# Altium PCB PCB1.PcbDoc
Units mil, origin at the board's own origin, x right, y up, seen from the top; angles counter-clockwise.
Board outline 6000 x 4000 mil, 2 copper layers (Top Layer, Bottom Layer); 55 components, 41 nets, 167 pads, 2 vias.
Unrouted connection lines stored in the file: 107.
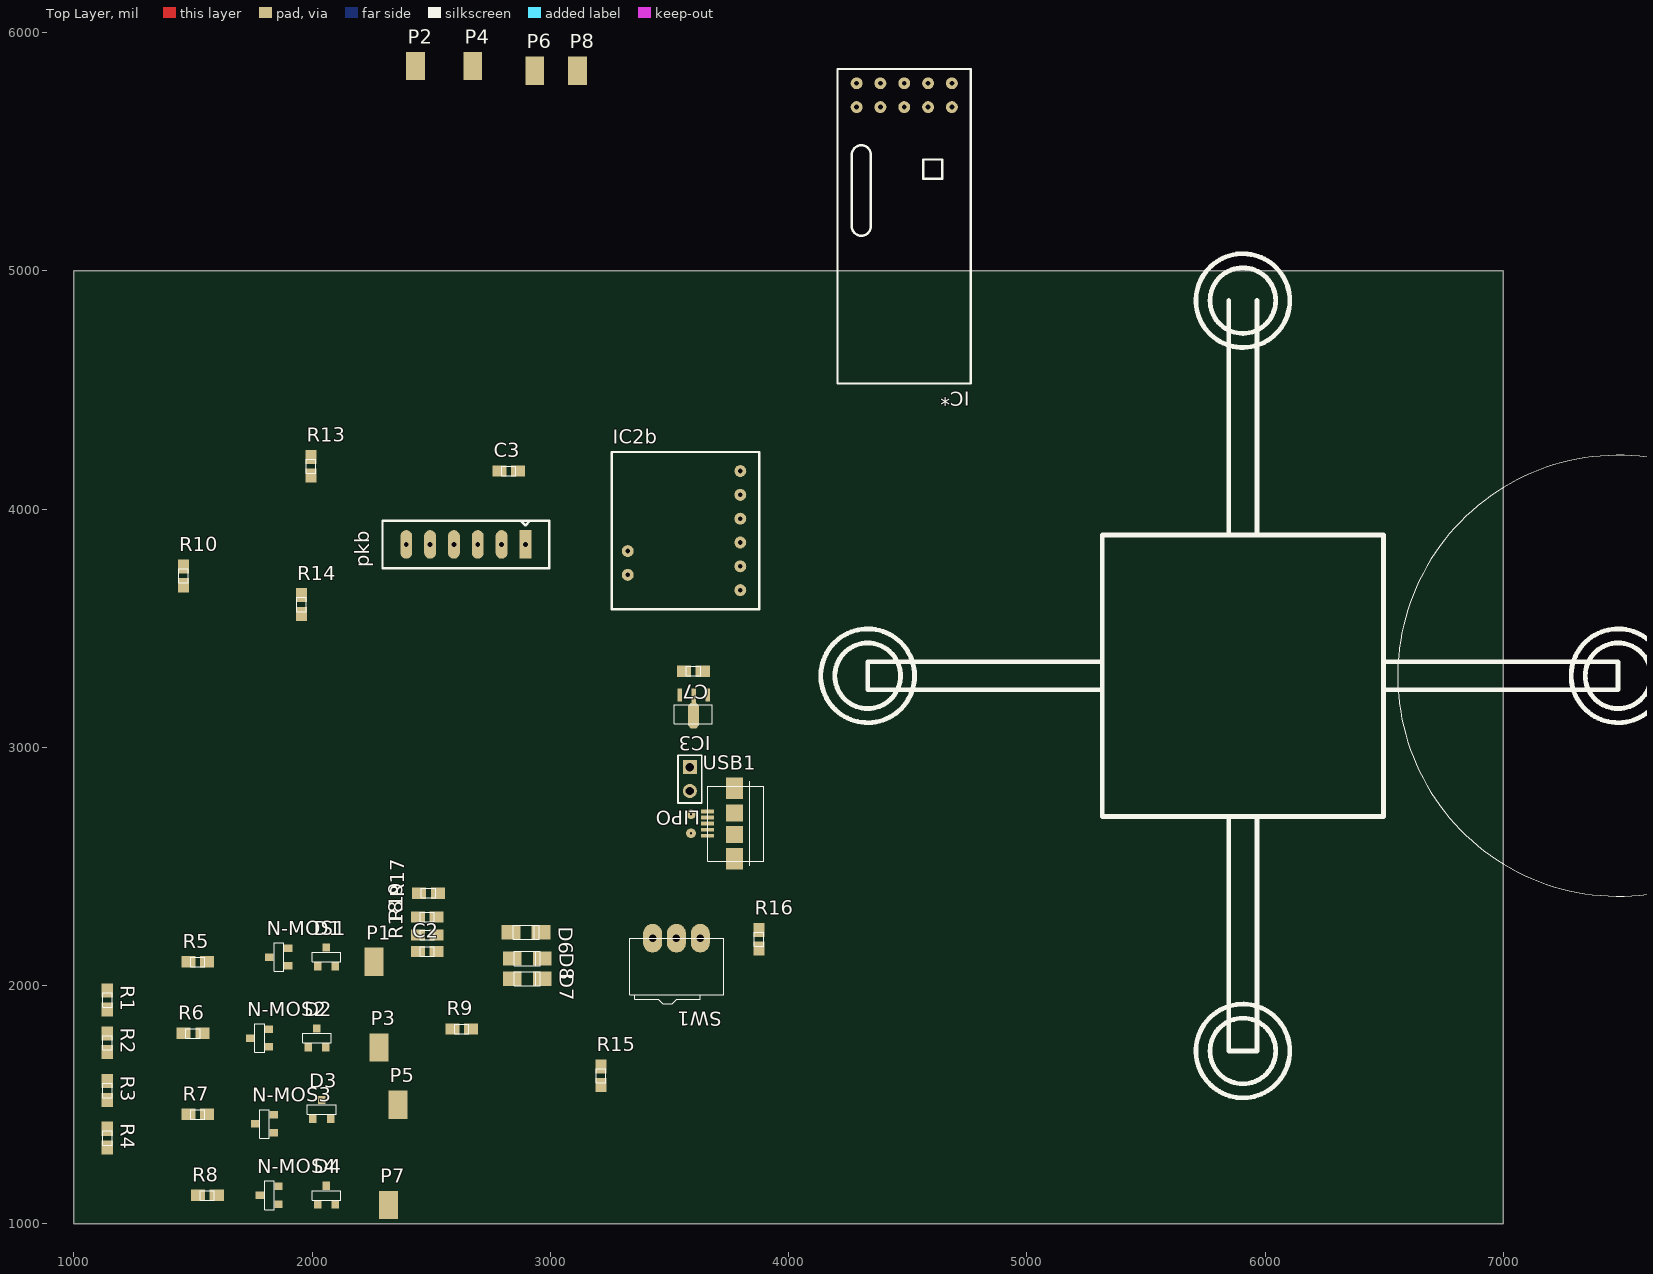
[diagram p0: Top Layer view]
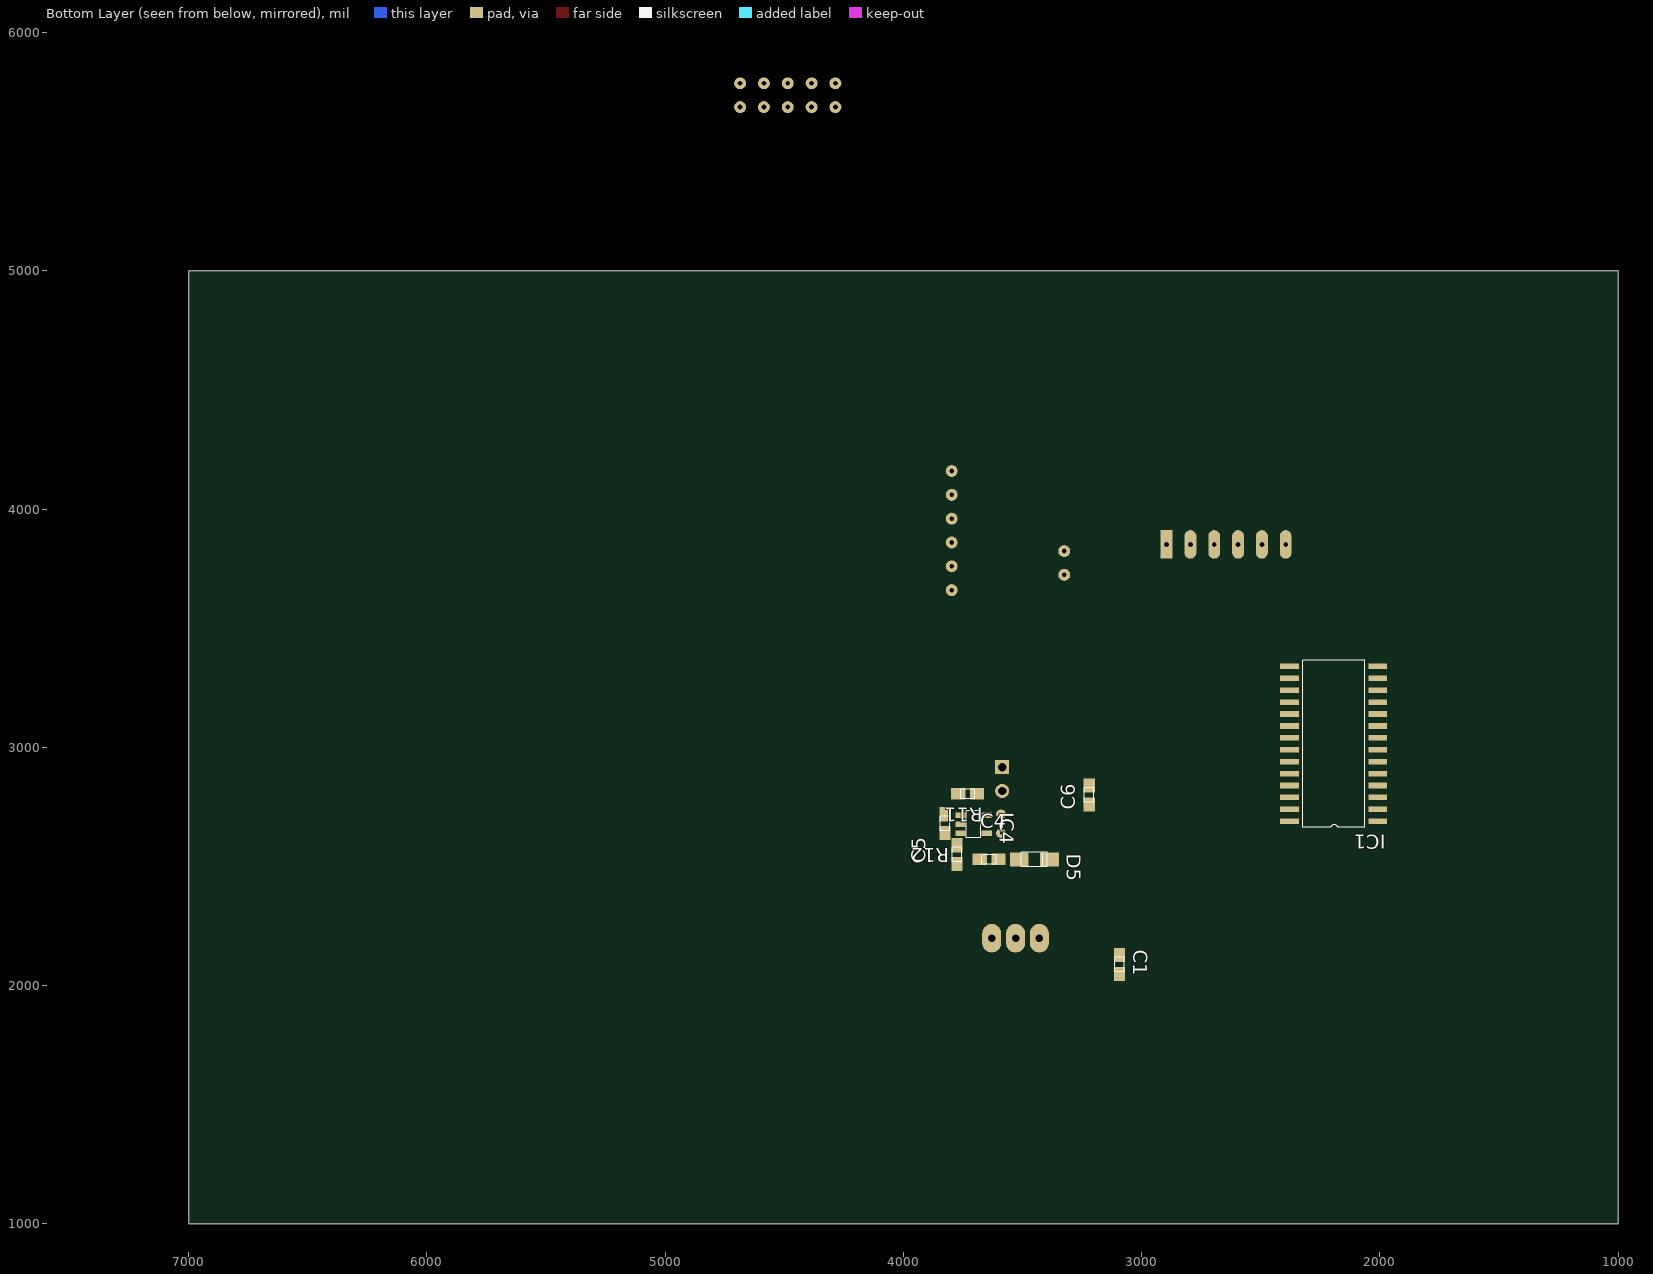
[diagram p1: Bottom Layer view, seen from below]

## Layer stack, top to bottom
Top Layer: signal copper 1.4
Dielectric: dielectric 12.6, FR-4, Dk 4.8
Bottom Layer: signal copper 1.4

## Board outline
1000,1000 7000,1000 7000,5000 1000,5000

## Design rules (kind name [scope] priority, off if disabled: settings)
Clearance [All] p1: gap=15
ComponentClearance [All] p1 off: gap=10 collisioncheckmode=3 verticalgap=10 showdistances=FALSE
PolygonConnect [All] p1: connectstyle=Relief reliefconductorwidth=10 reliefentries=4 polygonreliefangle="90 Angle"
RoutingVias [All] p1: holewidth=10 width=40 viastyle="Through Hole" minholewidth=10 minwidth=40 maxholewidth=10 maxwidth=40
SilkscreenOverComponentPads [All] p1: minsilkscreentomaskgap=10
SolderMaskExpansion [All] p1: expansion=4
Width [All] p1: maxlimit=15 minlimit=15 preferedwidth=15
26 further rules are at their usual default settings.

## Components (designator, comment, footprint, x,y, rotation, side; value= is the part's Value field where it differs from the comment)
C1 "TANTALE 10uf" cms805 3093,2089 r270 bottom
C2 "0.1uf ceramique" cms805 2483,2143 r0 top
C3 "1uf" cms805 2825,4160 r0 top
C4 "4.7uf" cms805 3640,2530 r180 bottom
C5 "4.7uf" cms805 3775,2550 r90 bottom
C6 "0.1uf ceramique" cms805 3220,2800 r90 bottom
C7 "1uF" cms805 3600,3320 r180 top
D1 "BAT54" SOT23 2060,2160 r0 top
D2 "BAT54" SOT23 2020,1820 r0 top
D3 "BAT54" SOT23 2040,1520 r0 top
D4 "BAT54" SOT23 2060,1160 r0 top
D5 "LED" cms1206 3450,2530 r180 bottom
D6 "LED" cms1206 2898,2224 r0 top
D7 "LED" cms1206 2903,2029 r0 top
D8 "LED" cms1206 2903,2114 r0 top
IC1 "dsPIC33FJ128MC802" SOIC28(300mil) 2009,2690 r0 bottom
IC2b "MPU6050" MPU6050_drotek 3797,4160 r0 top
IC3 "MCP1700" SOT89 3660,3220 r180 top
IC4 "MCP73831" SOT23-5 3720,2675 r270 bottom
IC* "NRF24L01" NRF24L01 4685.04,5787.4 r270 top
LIPO "Header 2" HDR1X2 3585,2917 r270 top
N-MOS1 "FD339" SOT23 1820,2120 r90 top
N-MOS2 "FD339" SOT23 1740,1780 r90 top
N-MOS3 "FD339" SOT23 1760,1420 r90 top
N-MOS4 "FD339" SOT23 1780,1120 r90 top
P1 "pad_moteur" PAD 2260,2100 r0 top
P2 "pad_moteur" PAD 2434,5860 r0 top
P3 "pad_moteur" PAD 2280,1740 r0 top
P4 "pad_moteur" PAD 2674,5860 r0 top
P5 "pad_moteur" PAD 2360,1500 r0 top
P6 "pad_moteur" PAD 2934,5840 r0 top
P7 "pad_moteur" PAD 2320,1080 r0 top
P8 "pad_moteur" PAD 3114,5840 r0 top
pkb "pickit3" pickit3 2895,3852 r180 top
R1 "10k" cms805 1140,1940 r270 top
R2 "10k" cms805 1140,1760 r270 top
R3 "10k" cms805 1140,1560 r270 top
R4 "10k" cms805 1140,1360 r270 top
R5 "330" cms805 1520,2100 r0 top
R6 "330" cms805 1500,1800 r0 top
R7 "330" cms805 1520,1460 r0 top
R8 "330" cms805 1560,1120 r0 top
R9 "10k" cms805 2628,1818 r0 top
R10 "10k" cms805 1460,3720 r90 top
R11 "4.7k" cms805 3730,2805 r0 bottom
R12 "150" cms805 3825,2680 r270 bottom
R13 "10k" cms805 1995,4180 r90 top
R14 "330" cms805 1955,3600 r90 top
R15 "17.25k" cms805 3212,1622 r90 top
R16 "4.7k" cms805 3875,2195 r90 top
R17 "65 + test" cms805 2488,2388 r180 top
R18 "65 + test" cms805 2483,2213 r180 top
R19 "65 + test" cms805 2483,2288 r180 top
SW1 "" inverseur 3629,2199 r180 top
USB1 "USB" USB_con 3660,2680 r90 top

## Footprints (in the part's own frame and the unit in brackets; to place one, negate y for a bottom-side part, rotate by r counter-clockwise, add the part's x,y. Pads: shape width x height; smd on the part's side, far side on the other; paste and mask are expansions set on the pad)
cms805 [mm]
  rect 1.5x1.2 smd: 1(-1,0) 2(1,0)
  silkscreen extent -0.76,-0.51 0.76,0.51
cms1206 [mm]
  rect 2x1.5 smd: 1(-1.6,0) 2(1.6,0)
  silkscreen extent -1.4,-0.76 1.4,0.76
HDR1X2 [mm] "Connector; Header; 2 Position"
  rect 1.5x1.5 hole 0.9: 1(0,0)
  round 1.5 hole 0.9: 2(2.54,0)
  silkscreen extent -1.27,-1.27 3.81,1.27
inverseur [mil]
  oval 80x120 hole 31.5: 1(0,0) 2(100,0) 3(200,0)
  silkscreen extent -98,0 295,276
MPU6050_drotek [mil]
  round 50 hole 20: 1(0,0) 2(0,-100) 3(0,-200) 4(0,-300) 5(0,-400) 6(0,-500) 7(-472.44,-335.83) 8(-472.44,-435.83)
  silkscreen extent -540,-580 80,80
NRF24L01 [mil]
  round 50 hole 20: 1(0,0) 2(0,-100) 3(0,-200) 4(0,-300) 5(0,-400) 6(100,-400) 7(100,-300) 8(100,-200) 9(100,-100) 10(100,0)
  silkscreen extent -60,-480 1260,80
PAD [mm]
  rect 2x3 smd: 1(0,0)
pickit3 [mil]
  rect 50x120 hole 20: 1(0,0)
  oval 50x120 hole 20: 2(100,0) 3(200,0) 4(300,0) 5(400,0) 6(500,0)
  silkscreen extent -100,-100 600,100
SOIC28(300mil) [mm]
  rect 2x0.6 smd: 1(0,0) 2(0,-1.27) 3(0,-2.54) 4(0,-3.81) 5(0,-5.08) 6(0,-6.35) 7(0,-7.62) 8(0,-8.89) 9(0,-10.16) 10(0,-11.43) 11(0,-12.7) 12(0,-13.97) 13(0,-15.24) 14(0,-16.51) 15(9.4,-16.51) 16(9.4,-15.24) 17(9.4,-13.97) 18(9.4,-12.7) 19(9.4,-11.43) 20(9.4,-10.16) 21(9.4,-8.89) 22(9.4,-7.62) 23(9.4,-6.35) 24(9.4,-5.08) 25(9.4,-3.81) 26(9.4,-2.54) 27(9.4,-1.27) 28(9.4,0)
  silkscreen extent 1.38,-17.14 8,0.64
SOT23 [mm]
  rect 0.8x0.9 smd: 1(-0.95,-2) 2(0,0) 3(0.95,-2)
  silkscreen extent -1.52,-1.52 1.52,-0.51
SOT23-5 [mm]
  rect 0.6x1.1 smd: 1(-1.016,-1.016) 2(-0.066,-1.016) 3(0.884,-1.016) 4(0.884,1.784) 5(-1.016,1.784)
  silkscreen extent -1.52,-0.38 1.4,1.14
SOT89 [mm]
  rect 0.48x1.4 smd: 1(0,0) 3(3,0)
  oct 1.2x2.7 smd: 2(1.5,2.2)
  rect 0.48x2 smd: 2(1.5,0.3)
  silkscreen extent -0.51,1.02 3.56,3.05
USB_con [mm]
  rect 2.3x1.8 smd: 0(-3.75,-2.85) 0(3.75,-2.85)
  rect 1.8x1.8 smd: 0(-1.15,-2.85) 0(1.15,-2.85)
  rect 0.4x1.4 smd: 1(-1.3,0) 2(-0.65,0) 3(0,0) 4(0.65,0) 5(1.3,0)
  silkscreen extent -4.5,-6 4.5,0

## Part data
C1 C2 C3 C4 C5 C6 C7: library part Capa
D1 D2 D3 D4: library part "Schottky BAT54"
IC2b: library part MPU6050-drotek
IC4: library part "MCP73831 Li-Po"
LIPO: "Header, 2-Pin"
N-MOS1 N-MOS2 N-MOS3 N-MOS4: library part "N-MOS FD339"
R1 R2 R3 R4 R5 R6 R7 R8 R9 R10 R11 R12 R13 R14 R15 R16 R17 R18 R19: library part Resistance
SW1: library part switch

## Via types
v1: diameter 40, hole 10, Top Layer to Bottom Layer, 2 vias

## Nets (pads, with @x,y where several pads share a name; then routed paths per layer and width w, separated by ;. In a path a pad name is that pad's centre, name@x,y a point inside that pad or via, vN(x,y) a via of type N, cw(c..) or ccw(c..) an arc to the next point about the centre after c; other vN are vias at no path point)
GND: C1.1 C2.1 C3.1 C4.1 C5.1 C6.2 C7.1 D6.2 D7.2 D8.2 IC1.8 IC1.19 IC1.27 IC2b.2 IC3.1 IC4.5 IC*.5 IC*.6 LIPO.2 N-MOS1.3 N-MOS2.3 N-MOS3.3 N-MOS4.3 pkb.3 R1.1 R2.1 R3.1 R4.1 R11.1 R13.1 R15.1 USB1.5
NET1: IC1.6 IC*.4
NET2: IC1.7 IC*.3
NetC1_2: C1.2 IC1.20
NetC3_2: C3.2 IC1.1 pkb.1 R10.1
NetD1_1: D1.1 N-MOS1.2 P1.1
NetD2_1: D2.1 N-MOS2.2 P3.1
NetD3_1: D3.1 N-MOS3.2 P5.1
NetD4_1: D4.1 N-MOS4.2 P7.1
NetD5_2: D5.2 R12.2
NetD6_1: D6.1 R17.1
NetD7_1: D7.1 R18.1
NetD8_1: D8.1 R19.1
NetIC1_2: IC1.2 R15.2 R16.1
NetIC1_4: IC1.4 pkb.4
NetIC1_5: IC1.5 pkb.5
NetIC1_9: IC1.9 R18.2
NetIC1_10: IC1.10 R19.2
NetIC1_11: IC1.11 IC*.7
NetIC1_12: IC1.12 R17.2
NetIC1_14: IC1.14 IC2b.5
NetIC1_15: IC1.15 IC2b.4
NetIC1_16: IC1.16 IC2b.6
NetIC1_17: IC1.17 R14.2
NetIC1_18: IC1.18 R8.1
NetIC1_21: IC1.21 IC*.8
NetIC1_22: IC1.22 R7.1
NetIC1_23: IC1.23 IC*.9
NetIC1_24: IC1.24 R6.1
NetIC1_26: IC1.26 R5.1
NetIC4_1: IC4.1 R12.1
NetIC4_2: IC4.2 R11.2
NetIC*_2: IC*.2 R9.1
NetLIPO_1: LIPO.1 SW1.1
PWM1: N-MOS1.1 R1.2 R5.2
PWM2: N-MOS2.1 R2.2 R6.2
PWM3: N-MOS3.1 R3.2 R7.2
PWM4: N-MOS4.1 R4.2 R8.2
USB: C4.2 D5.1 IC4.4 R13.2 R14.1 USB1.1
VBAT: C5.2 D1.2 D2.2 D3.2 D4.2 IC3.2 IC4.3 P2.1 P4.1 P6.1 P8.1 R16.2 SW1.2
VCC: C2.2 C6.1 C7.2 IC1.13 IC1.28 IC2b.3 IC3.3 IC*.1 IC*.10 pkb.2 R9.2 R10.2
pads on no net: D1.3 D2.3 D3.3 D4.3 IC1.3 IC1.25 IC2b.1 IC2b.7 IC2b.8 pkb.6 SW1.3 USB1.0 USB1.2 USB1.3 USB1.4
copper on no net:
  other v1: 3590,2640 3590,2720

## Silkscreen, mask and mechanical layers (free items; w line width, h text height)
Top Overlay:
  circle w20: c5906.45,1725.75 r137.8
  circle w20: c5906.45,1725.75 r196.85
  circle w20: c7481.25,3300.55 r196.85
  circle w20: c7481.25,3300.55 r137.8
  circle w20: c5906.45,4875.35 r196.85
  circle w20: c5906.45,4875.35 r137.8
  circle w20: c4331.65,3300.55 r196.85
  circle w20: c4331.65,3300.55 r137.8
  circle w5: c7481.25,3300.55 r925.2
  lines w20: 5315.9,3241.5 4331.65,3241.5 4331.65,3359.61 5315.9,3359.61 ; 5847.39,2710 5847.39,1725.75 5965.5,1725.75 5965.5,2710 ; 5847.39,3891.1 5847.39,4875.35 ; 5965.5,3891.1 5965.5,4875.35 ; 6497,3241.5 7481.25,3241.5 7481.25,3359.61 6497,3359.61 ; 5315.9,2710 6497,2710 6497,3891.1 5315.9,3891.1 5315.9,2710